# Altium PCB PCB1.PcbDoc
Units mil, origin at the board's own origin, x right, y up, seen from the top; angles counter-clockwise.
Board outline 3750 x 2850 mil, 2 copper layers (Top Layer, Bottom Layer); 30 components, 43 nets, 138 pads, 1 vias.
Unrouted connection lines stored in the file: 1.
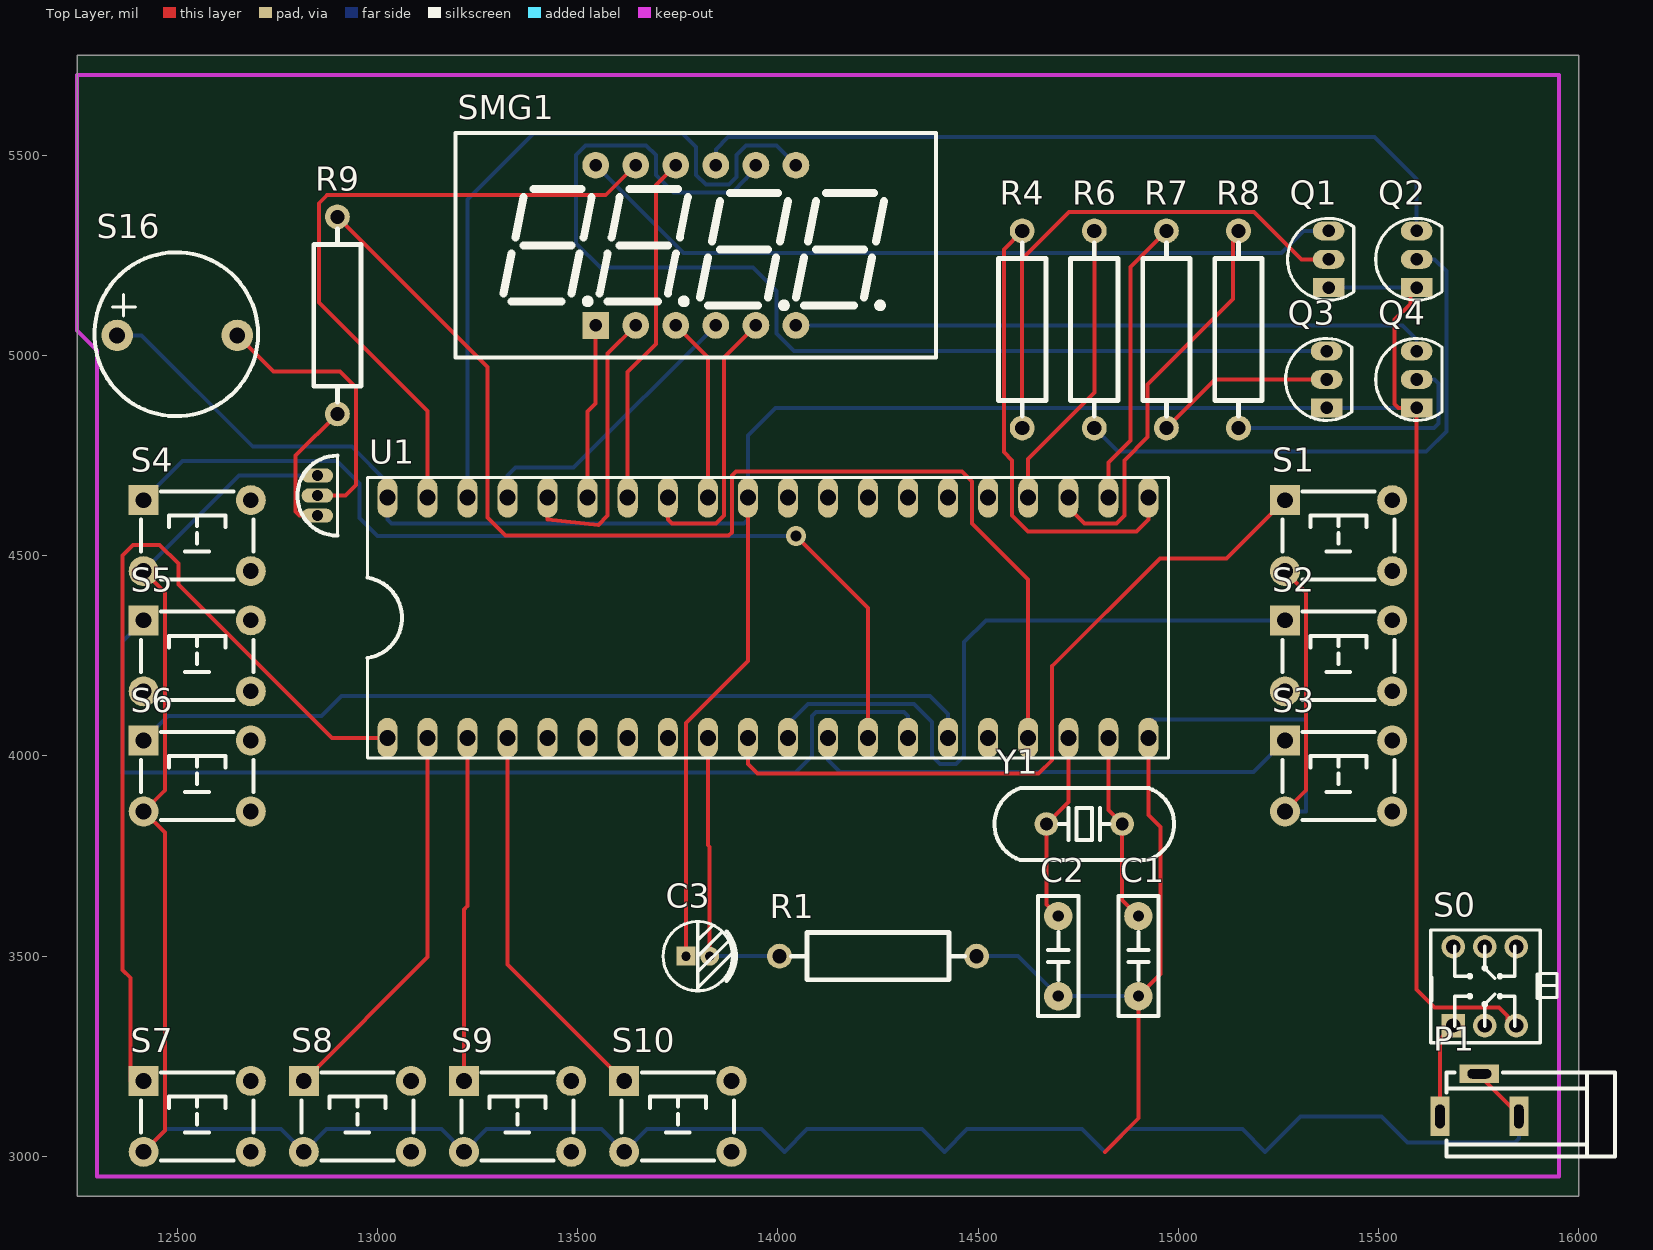
[diagram p0: Top Layer view]
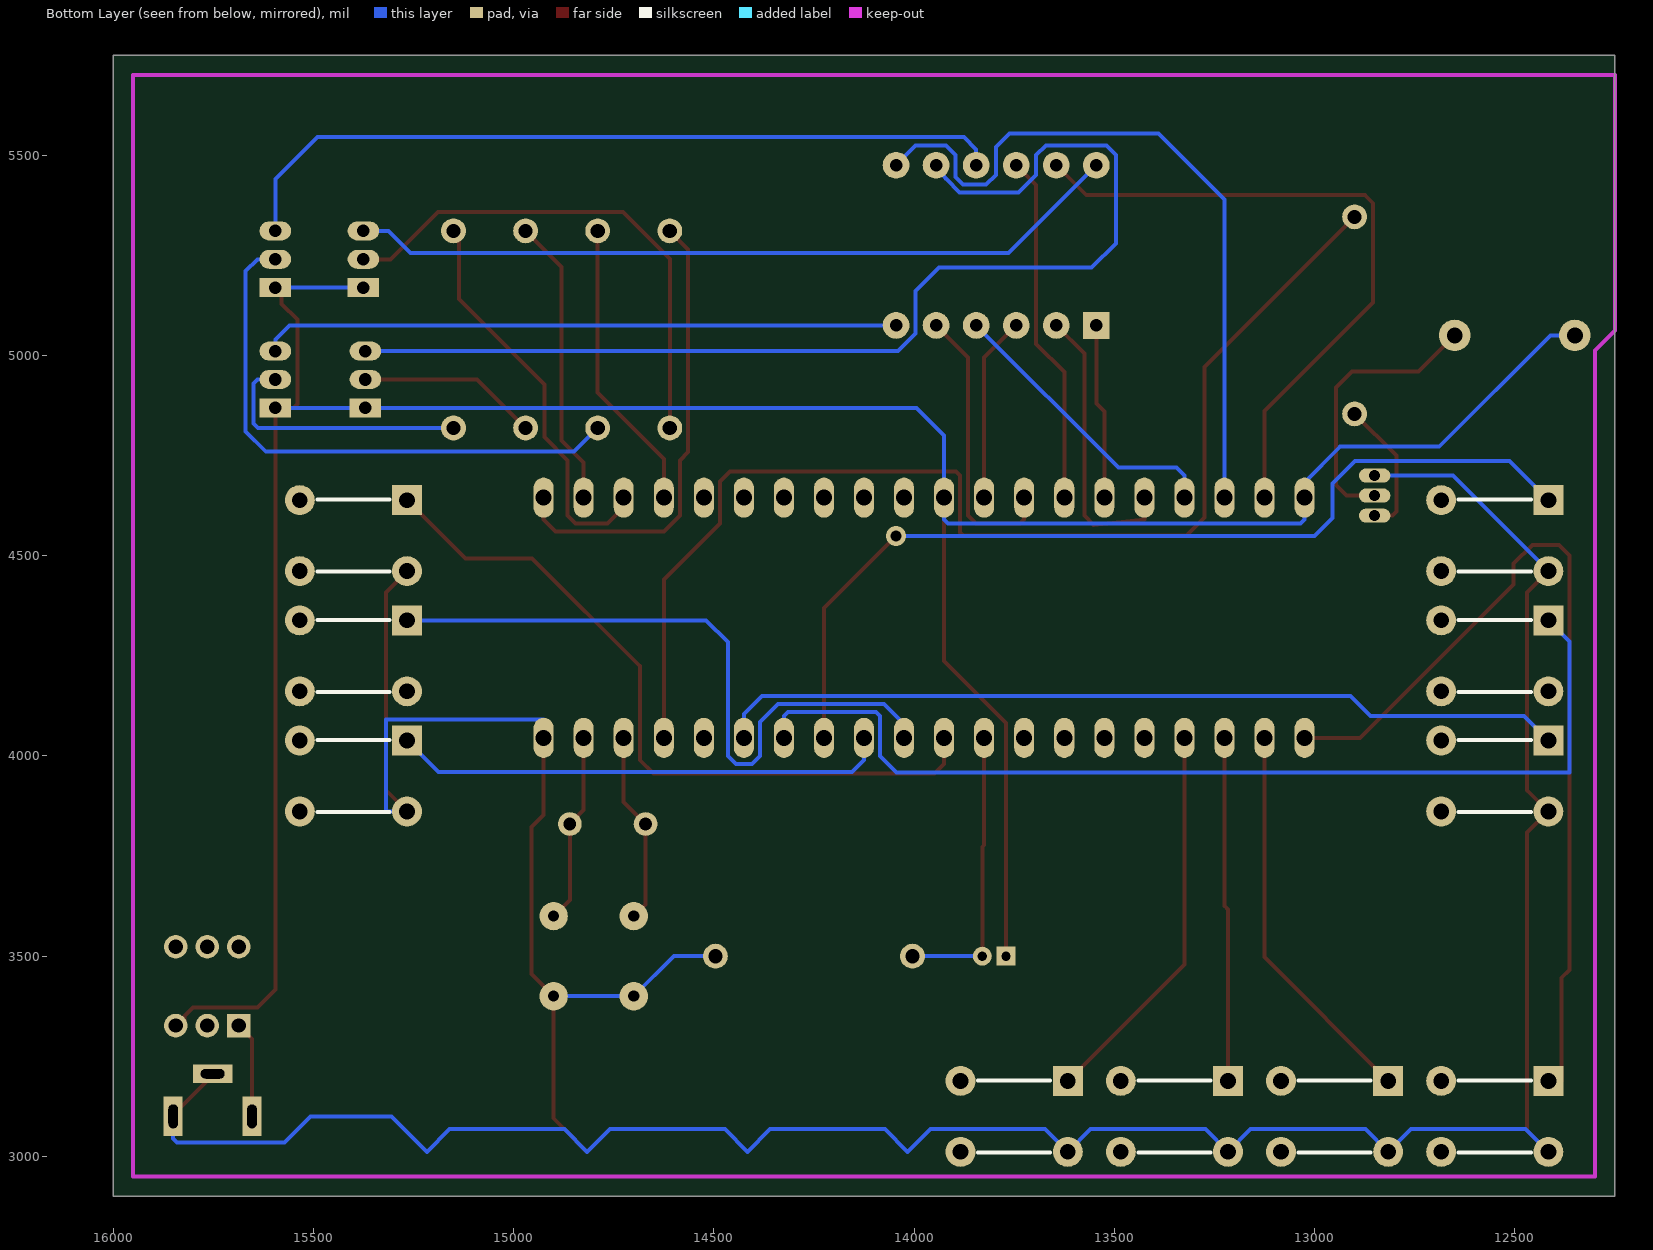
[diagram p1: Bottom Layer view, seen from below]
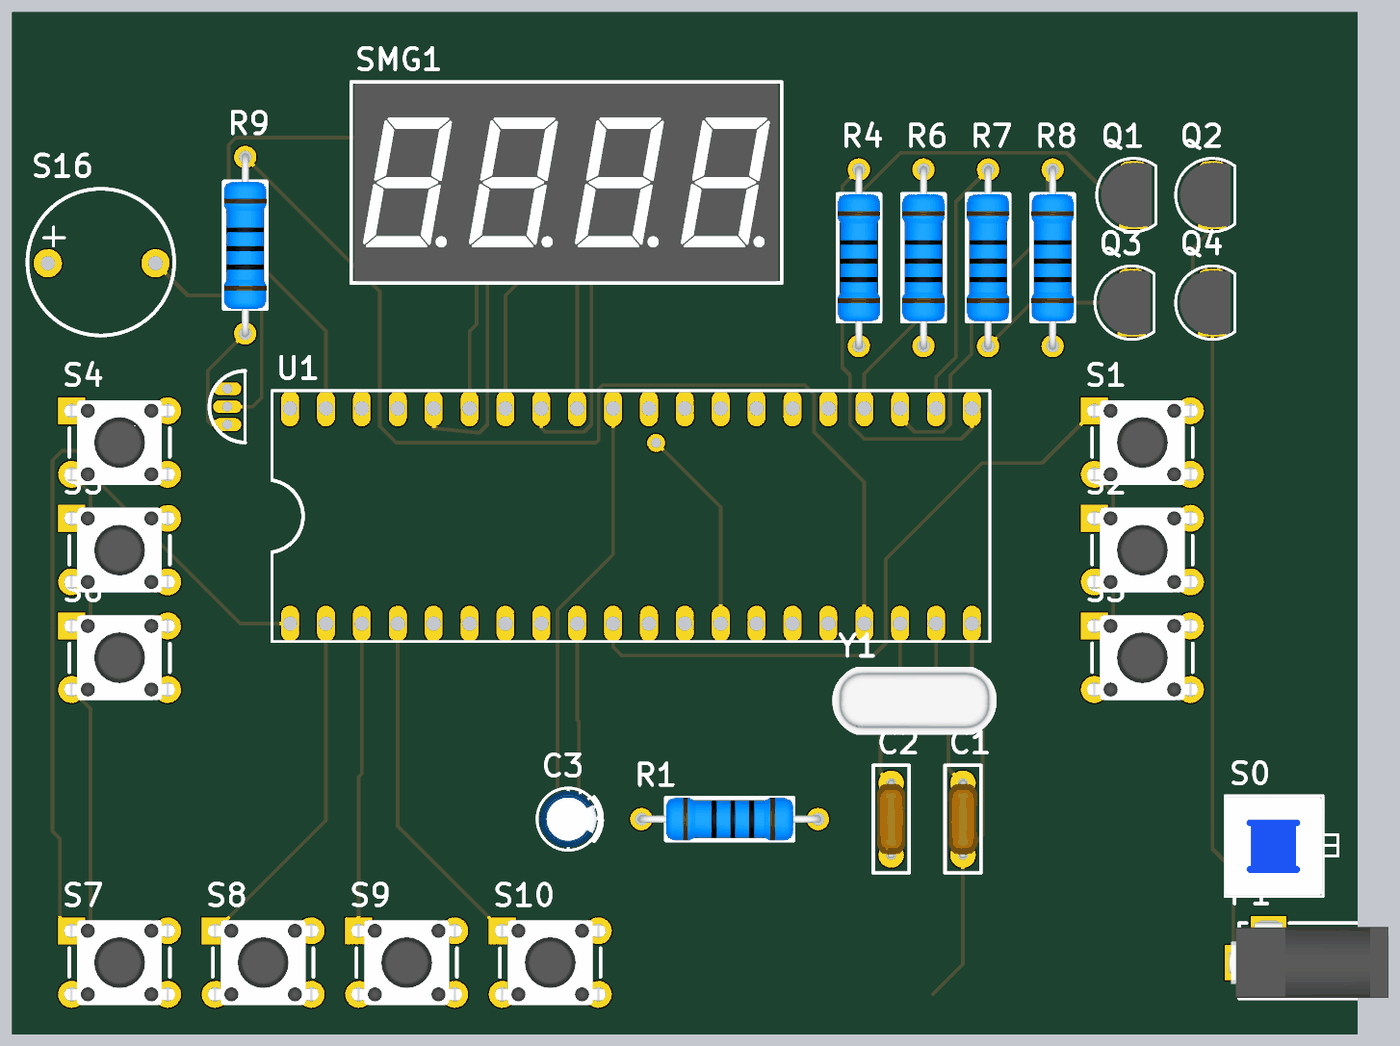
[diagram p2: 3D render of the assembled board from above, using the file's embedded part models]

## Layer stack, top to bottom
Top Layer: signal copper 1.4
Dielectric: dielectric 12.6, FR-4, Dk 4.8
Bottom Layer: signal copper 1.4

## Board outline
12250,5750 16000,5750 16000,2900 12250,2900

## Design rules (kind name [scope] priority, off if disabled: settings)
Clearance [All] p1: gap=10
PolygonConnect [All] p1: connectstyle=Relief reliefconductorwidth=10 reliefentries=4 polygonreliefangle="90 Angle"
RoutingVias [All] p1: holewidth=28 width=50 viastyle="Through Hole" minholewidth=28 minwidth=50 maxholewidth=28 maxwidth=50
SilkscreenOverComponentPads [All] p1: minsilkscreentomaskgap=10
SolderMaskExpansion [All] p1: expansion=4
Width [All] p1: maxlimit=10 minlimit=10 preferedwidth=10
27 further rules are at their usual default settings.

## Components (designator, comment, footprint, x,y, rotation, side; value= is the part's Value field where it differs from the comment)
C1 "30P" MLCC5.08-A 14900,3500 r90 top
C2 "30P" MLCC5.08-A 14700,3500 r90 top
C3 "10uf" "CAP 1.5*4*8" 13800,3500 r0 top
P1 "DC" DC-002 15850,3100 r0 top
Q1 "S9012" TO92A 15375,5240 r0 top
Q2 "S9012" TO92A 15595,5240 r0 top
Q3 "S9012" TO92A 15370,4940 r0 top
Q4 "S9012" TO92A 15595,4940 r0 top
R1 "10k" "RS 1/2W" 14250,3500 r180 top
R4 "1K" "RS 1/2W" 14610,5065 r90 top
R6 "1K" "RS 1/2W" 14790,5065 r90 top
R7 "1K" "RS 1/2W" 14970,5065 r90 top
R8 "1K" "RS 1/2W" 15150,5065 r90 top
R9 "1K" "RS 1/2W" 12900,5100 r90 top
S0 "SWITCH" "KFT DIP-7X7" 15765,3425 r90 top
S1 "" "TSW DIP-6*6*11" 15400,4550 r0 top
S2 "" "TSW DIP-6*6*11" 15400,4250 r0 top
S3 "" "TSW DIP-6*6*11" 15400,3950 r0 top
S4 "" "TSW DIP-6*6*11" 12550,4550 r0 top
S5 "" "TSW DIP-6*6*11" 12550,4250 r0 top
S6 "" "TSW DIP-6*6*11" 12550,3950 r0 top
S7 "" "TSW DIP-6*6*11" 12550,3100 r0 top
S8 "" "TSW DIP-6*6*11" 12950,3100 r0 top
S9 "" "TSW DIP-6*6*11" 13350,3100 r0 top
S10 "" "TSW DIP-6*6*11" 13750,3100 r0 top
S16 "SPEAKER" 蜂鸣器 12350,5050 r0 top
SMG1 "3641B" "SMG 0.36-4P" 13795,5275 r0 top
U1 "STC89C51RC" 单片机直插 13025,4045 r90 top
Y1 "12M" "XTAL-49S DIP" 14765,3830 r180 top
? "Q1" pnp三极管-dip 12850,4600 r90 top

## Footprints (in the part's own frame and the unit in brackets; to place one, negate y for a bottom-side part, rotate by r counter-clockwise, add the part's x,y. Pads: shape width x height; smd on the part's side, far side on the other; paste and mask are expansions set on the pad)
"CAP 1.5*4*8" [mm] "脚距1.5mm直"
  rect 1.2x1.2 hole 0.6: 1(-0.75,0)
  round 1.2 hole 0.6: 2(0.75,0)
  silkscreen extent -2.2,-2.2 2.41,2.2, body extent -2,-2 2.02,2, height 8.04
DC-002 [mm] "3.5*"
  rect 1.2x2.5 hole 0.6 slot 1.5 at 90 deg: 1(-5,0) 2(0,0)
  rect 2.5x1.2 hole 0.6 slot 1.5 at 0 deg: 3(-2.5,2.7)
  silkscreen extent -4.57,-2.54 6.1,2.79, body extent -5.3,-2.5 6,2.85, height 7.3
"KFT DIP-7X7" [mm] "自锁¿"
  rect 1.5x1.5 hole 0.9: 1(-2.5,2)
  round 1.5 hole 0.9: 2(-2.5,0) 3(-2.5,-2) 4(2.5,-2) 5(2.5,0) 6(2.5,2)
  silkscreen extent -3.58,-4.58 3.56,3.42, body extent -3.5,-3.5 3.5,3.5, height 11.2
MLCC5.08-A [mm] "独石µ"
  round 1.8 hole 0.7: 1(-2.54,0) 2(2.54,0)
  silkscreen extent -3.81,-1.27 3.81,1.27, body extent -2.79,-1 2.79,1, height 3.71
pnp三极管-dip [mm]
  oval 0.9x2 hole 0.7: 1(0,0) 2(1.27,0) 3(2.54,0)
  silkscreen extent -1.27,-1.27 3.81,1.27
"RS 1/2W" [mil] "直插色环电"
  round 62 hole 35.43: 1(-246.06,0) 2(246.06,0)
  silkscreen extent -217,-59 217,59, body extent -256,-59 256,59, height 122
"SMG 0.36-4P" [mm]
  rect 1.7x1.7 hole 0.8: 1(-6.35,-5.08)
  round 1.7 hole 0.8: 2(-3.81,-5.08) 3(-1.27,-5.08) 4(1.27,-5.08) 5(3.81,-5.08) 6(6.35,-5.08) 7(6.35,5.08) 8(3.81,5.08) 9(1.27,5.08) 10(-1.27,5.08) 11(-3.81,5.08) 12(-6.35,5.08)
  silkscreen extent -15.24,-7.11 15.24,7.11, body extent -15,-7 15,7, height 7.2
TO92A [mm]
  rect 2x1.2 hole 0.8: 1(0,-1.8)
  oval 2x1.2 hole 0.8: 2(0,0) 3(0,1.8)
  silkscreen extent -2.6,-2.6 1.6,2.6, body extent -2.3,-2.3 1.3,2.3, height 7.6
"TSW DIP-6*6*11" [mm] "6*6*11"
  rect 1.9x1.9 hole 1: 1(-3.4,2.25)
  round 1.9 hole 1: 2(-3.4,-2.25) 3(3.4,-2.25) 4(3.4,2.25)
  silkscreen extent -3.56,-2.79 3.56,2.79, body extent -4.11,-3 4.11,3, height 10.95
"XTAL-49S DIP" [mm]
  round 1.5 hole 0.8: 1(-2.4,0) 2(2.4,0)
  silkscreen extent -5.7,-2.28 5.7,2.28, body extent -5.68,-2.35 5.68,2.3, height 3.5
单片机直插 [mil]
  oval 100x50 hole 40: 1(0,0) 2(0,-100) 3(0,-200) 4(0,-300) 5(0,-400) 6(0,-500) 7(0,-600) 8(0,-700) 9(0,-800) 10(0,-900) 11(0,-1000) 12(0,-1100) 13(0,-1200) 14(0,-1300) 15(0,-1400) 16(0,-1500) 17(0,-1600) 18(0,-1700) 19(0,-1800) 20(0,-1900) 21(600,-1900) 22(600,-1800) 23(600,-1700) 24(600,-1600) 25(600,-1500) 26(600,-1400) 27(600,-1300) 28(600,-1200) 29(600,-1100) 30(600,-1000) 31(600,-900) 32(600,-800) 33(600,-700) 34(600,-600) 35(600,-500) 36(600,-400) 37(600,-300) 38(600,-200) 39(600,-100) 40(600,0)
  silkscreen extent -50,-1950 650,50
蜂鸣器 [mm]
  round 2 hole 1: 1(0,0) 2(7.62,0)
  silkscreen extent -1.44,-5.12 8.94,5.27

## Part data
C1 C2: library part CAP, "Capacitor"
C3: library part CAPACITOR, "Capacitor"
P1: library part POWER
Q1 Q2 Q3 Q4: library part 9012-DIP, "低频放´"
R1 R4 R6 R7 R8 R9: library part RES2
S1 S2 S3 S4 S5 S6 S7 S8 S9 S10: library part SW-PB
S16: library part SPE
SMG1: "0.36寸4位共阳数码管"
U1: library part S
Y1: library part CRYSTAL, "Cryst"
?: library part PNP, "PNP Transi"

## Via types
v1: diameter 50, hole 28, Top Layer to Bottom Layer, 1 vias

## Nets (pads, with @x,y where several pads share a name; then routed paths per layer and width w, separated by ;. In a path a pad name is that pad's centre, name@x,y a point inside that pad or via, vN(x,y) a via of type N, cw(c..) or ccw(c..) an arc to the next point about the centre after c; other vN are vias at no path point)
GND: ?.3 C1.1 C2.1 P1.2 P1.3 R1.1 S1.2 S3.2 S4.2 S6.2 S7.2 S8.2 S9.2 S10.2 U1.20 | length 9017.2
  Top Layer w10: S7.2 12469,3064.28 12469,3808.56 S6.2 12469,3914.28 12469,4408.56 S4.2 ; 14816.14,3011.42 14900,3095.28 C1.1 14955,3455 14955,3823 14925,3853 U1.20 ; S3.2 15319,3914.28 15319,4408.56 S1.2 ; P1.3 15751.57,3201.43 15850,3103 P1.2
  Bottom Layer w10: S7.2 12472.72,3068 12759.56,3068 S8.2 12872.72,3068 13159.56,3068 S9.2 13272.72,3068 13559.56,3068 S10.2 13672.72,3068 13959.56,3068 14016.14,3011.42 14072.72,3068 14359.56,3068 14416.14,3011.42 14472.72,3068 14759.56,3068 14816.14,3011.42 14872.72,3068 15159.56,3068 15216.14,3011.42 15304.72,3100 15507,3100 15572,3035 15840,3035 15850,3045 P1.2 ; S4.2 12654.72,4700 ?.3 ; R1.1 14600,3500 C2.1 C1.1 ; U1.20 14925,4091 15319,4091 15319,3861.42 S3.2
Net_1: ?.1 R9.1 | length 345.7
  Top Layer w10: ?.1 12805.63,4600 12795.63,4610 12795.63,4749.57 R9.1
Net_2: ?.2 S16.2 | length 700.6
  Top Layer w10: S16.2 12740,4960 12906,4960 12946,4920 12946,4676 12920,4650 ?.2
NetC1_2: C1.2 U1.19 Y1.1 | length 476.1
  Top Layer w10: U1.19 14825,3864.49 Y1.1 14859.49,3640.51 C1.2
NetC2_2: C2.2 U1.18 Y1.2 | length 479.8
  Top Layer w10: C2.2 14670.51,3629.49 Y1.2 14725,3884.49 U1.18
NetC3_2: C3.2 R1.2 U1.9 | length 721.3
  Top Layer w10: U1.9 13825,3777.53 13829.53,3773 C3.2
  Bottom Layer w10: C3.2 R1.2
NetP1_1: P1.1 S0.1 | length 240.3
  Top Layer w10: P1.1 15653.15,3293.46 S0.1
NetQ1_2: Q1.2 R4.1 | length 1284.4
  Top Layer w10: R4.1 14610,5241 14727,5358 15189,5358 15307,5240 Q1.2
NetQ1_3: Q1.3 SMG1.12 | length 1943.4
  Bottom Layer w10: SMG1.12 13764,5256 15258,5256 15312.87,5310.87 Q1.3
NetQ2_2: Q2.2 R6.1 | length 1411.4
  Bottom Layer w10: R6.1 14848.94,4760 15618.86,4760 15669.37,4810.51 15669.37,5210.63 15640,5240 Q2.2
NetQ2_3: Q2.3 SMG1.9 | length 1974.9
  Bottom Layer w10: SMG1.9 13845,5514.76 13875.24,5545 15490,5545 15595,5440 Q2.3
NetQ3_2: Q3.2 R7.1 | length 450.1
  Top Layer w10: R7.1 15091.06,4940 Q3.2
NetQ3_3: Q3.3 SMG1.8 | length 2835.6
  Bottom Layer w10: SMG1.8 13919.48,5440 13886.01,5406.53 13739.47,5406.53 13695,5451 13695,5500 13671,5524 13520,5524 13496,5500 13496,5280 13557,5219 13938,5219 13996,5161 13996,5054.87 14040,5010.87 Q3.3
NetQ4_2: Q4.2 R8.1 | length 662.2
  Bottom Layer w10: R8.1 15637.8,4818.94 15649.37,4830.51 15649.37,4930 15639.37,4940 Q4.2
NetQ4_3: Q4.3 SMG1.6 | length 1593.6
  Bottom Layer w10: SMG1.6 15560,5075 15595,5040 Q4.3
NetR4_2: R4.2 U1.21 | length 1162.8
  Top Layer w10: R4.2 14564,5265.06 14564,4759 14585,4738 14585,4600 14625,4560 14895,4560 14925,4590 U1.21
NetR6_2: R6.2 U1.24 | length 734.4
  Top Layer w10: U1.24 14625,4742 14790,4907 R6.2
NetR7_2: R7.2 U1.22 | length 726.1
  Top Layer w10: U1.22 14825,4733 14880,4788 14880,5221.06 R7.2
NetR8_2: R8.2 U1.23 | length 1027.2
  Top Layer w10: U1.23 14725,4620 14765,4580 14845,4580 14865,4600 14865,4738 14923,4796 14923,4928 15136,5141 15136,5311.06 R8.2
NetR9_2: R9.2 U1.17 | length 2992.9
  Top Layer w10: R9.2 13275,4971.06 13275,4595 13320,4550 13877.19,4550 13885,4557.81 13885,4700 13895,4710 14460,4710 14485,4685 14485,4580 14625,4440 U1.17
NetS1_1: S1.1 U1.10 | length 1835.9
  Top Layer w10: U1.10 13925,3980 13949,3956 14651,3956 14685,3990 14685,4224 14954,4493 15120.56,4493 S1.1
NetS2_1: S2.1 U1.11 | length 1723.7
  Bottom Layer w10: U1.11 14025,4080 14075,4130 14340,4130 14385,4085 14385,4000 14405,3980 14445,3980 14465,4000 14465,4284 14519.58,4338.58 S2.1
NetS3_1: S3.1 U1.12 | length 1241.1
  Bottom Layer w10: U1.12 14125,3990 14155,3960 15187.56,3960 S3.1
NetS4_1: S4.1 U1.13 | length 2375.6
  Top Layer w10: v1(14045,4549) 14225,4369 U1.13
  Bottom Layer w10: S4.1 12513.56,4736 12899,4736 12955,4680 12955,4594 13000,4549 v1(14045,4549)
NetS5_1: S5.1 U1.14 | length 2543.3
  Bottom Layer w10: S5.1 12363,4285.44 12363,3960 12364,3959 14044,3959 14085,4000 14085,4100 14095,4110 14315,4110 14325,4100 U1.14
NetS6_1: S6.1 U1.15 | length 2133.6
  Bottom Layer w10: S6.1 12477.56,4100 12860,4100 12910,4150 14380,4150 14425,4105 U1.15
NetS7_1: S7.1 U1.1 | length 2255.6
  Top Layer w10: S7.1 12384,3188.58 12384,3445 12363,3466 12363,4500 12390,4527 12456,4527 12503,4480 12503,4428 12886,4045 U1.1
NetS8_1: S8.1 U1.2 | length 984.4
  Top Layer w10: S8.1 13125,3497.44 U1.2
NetS9_1: S9.1 U1.3 | length 860.1
  Top Layer w10: S9.1 13216.14,3617 13225,3625.86 U1.3
NetS10_1: S10.1 U1.4 | length 977
  Top Layer w10: U1.4 13325,3479.72 S10.1
NetS11_1: U1.5
NetS12_1: U1.6
NetS13_1: U1.7
NetS14_1: U1.8
NetSMG1_1: SMG1.1 U1.35 | length 438.3
  Top Layer w10: U1.35 13525,4860 13545,4880 SMG1.1
NetSMG1_2: SMG1.2 U1.36 | length 719.2
  Top Layer w10: U1.36 13425,4590 13552,4577 13575,4600 13575,5005 SMG1.2
NetSMG1_3: SMG1.3 U1.32 | length 463.1
  Top Layer w10: SMG1.3 13825,4995 U1.32
NetSMG1_4: SMG1.4 U1.37 | length 730.3
  Bottom Layer w10: U1.37 13325,4700 13345,4720 13490,4720 SMG1.4
NetSMG1_5: SMG1.5 U1.33 | length 715.6
  Top Layer w10: U1.33 13725,4590 13735,4580 13845,4580 13865,4600 13865,4995 SMG1.5
NetSMG1_7: SMG1.7 U1.38 | length 1818.7
  Bottom Layer w10: U1.38 13225,5389 13390,5554 13762,5554 13796,5520 13796,5450.53 13820,5426.53 13877.53,5426.53 13896,5445 13896,5500 13920,5524 13996,5524 SMG1.7
NetSMG1_10: SMG1.10 U1.34 | length 879.7
  Top Layer w10: U1.34 13625,4959 13695,5029 13695,5425 SMG1.10
NetSMG1_11: SMG1.11 U1.39 | length 1677.6
  Top Layer w10: U1.39 13125,4861 12854,5132 12854,5380 12874,5400 13570,5400 SMG1.11
VCC: C3.1 Q1.1 Q2.1 Q3.1 Q4.1 S0.3 S16.1 U1.31 U1.40 | length 7299.3
  Top Layer w10: C3.1 13770.47,4082.47 13925,4237 U1.31 ; Q2.1 15579,5169.13 15579,5129 15540,5090 15540,4879.13 15550,4869.13 Q4.1 15595,3417 15640,3372 15800,3372 15822,3350 15822,3326.57 S0.3
  Bottom Layer w10: S16.1 12411,5050 12689,4772 12936,4772 13025,4683 U1.40 13025,4590 13035,4580 13915,4580 13925,4590 U1.31 13925,4800 13994.13,4869.13 Q3.1 Q4.1 ; Q1.1 Q2.1
pads on no net: S0.2 S0.4 S0.5 S0.6 S1.3 S1.4 S2.2 S2.3 S2.4 S3.3 S3.4 S4.3 S4.4 S5.2 S5.3 S5.4 S6.3 S6.4 S7.3 S7.4 S8.3 S8.4 S9.3 S9.4 S10.3 S10.4 U1.16 U1.25 U1.26 U1.27 U1.28 U1.29 U1.30

## Keep-outs
Keep-Out Layer:
  lines w10: 12250,5062.5 12250,5700 15950,5700 15950,2950 12300,2950 12300,3637.5 12300,5012.5 12250,5062.5